# Altium PCB main.PcbDoc
Units mm, origin at the board's own origin, x right, y up, seen from the top; angles counter-clockwise.
Board outline 53.34 x 57.15 mm, 4 copper layers (Top Layer, Int1 (GND), Int2 (GND), Bottom Layer), stack 1.11 mm thick; 28 components, 19 nets, 192 pads, 0 vias.
Unrouted connection lines stored in the file: 31.
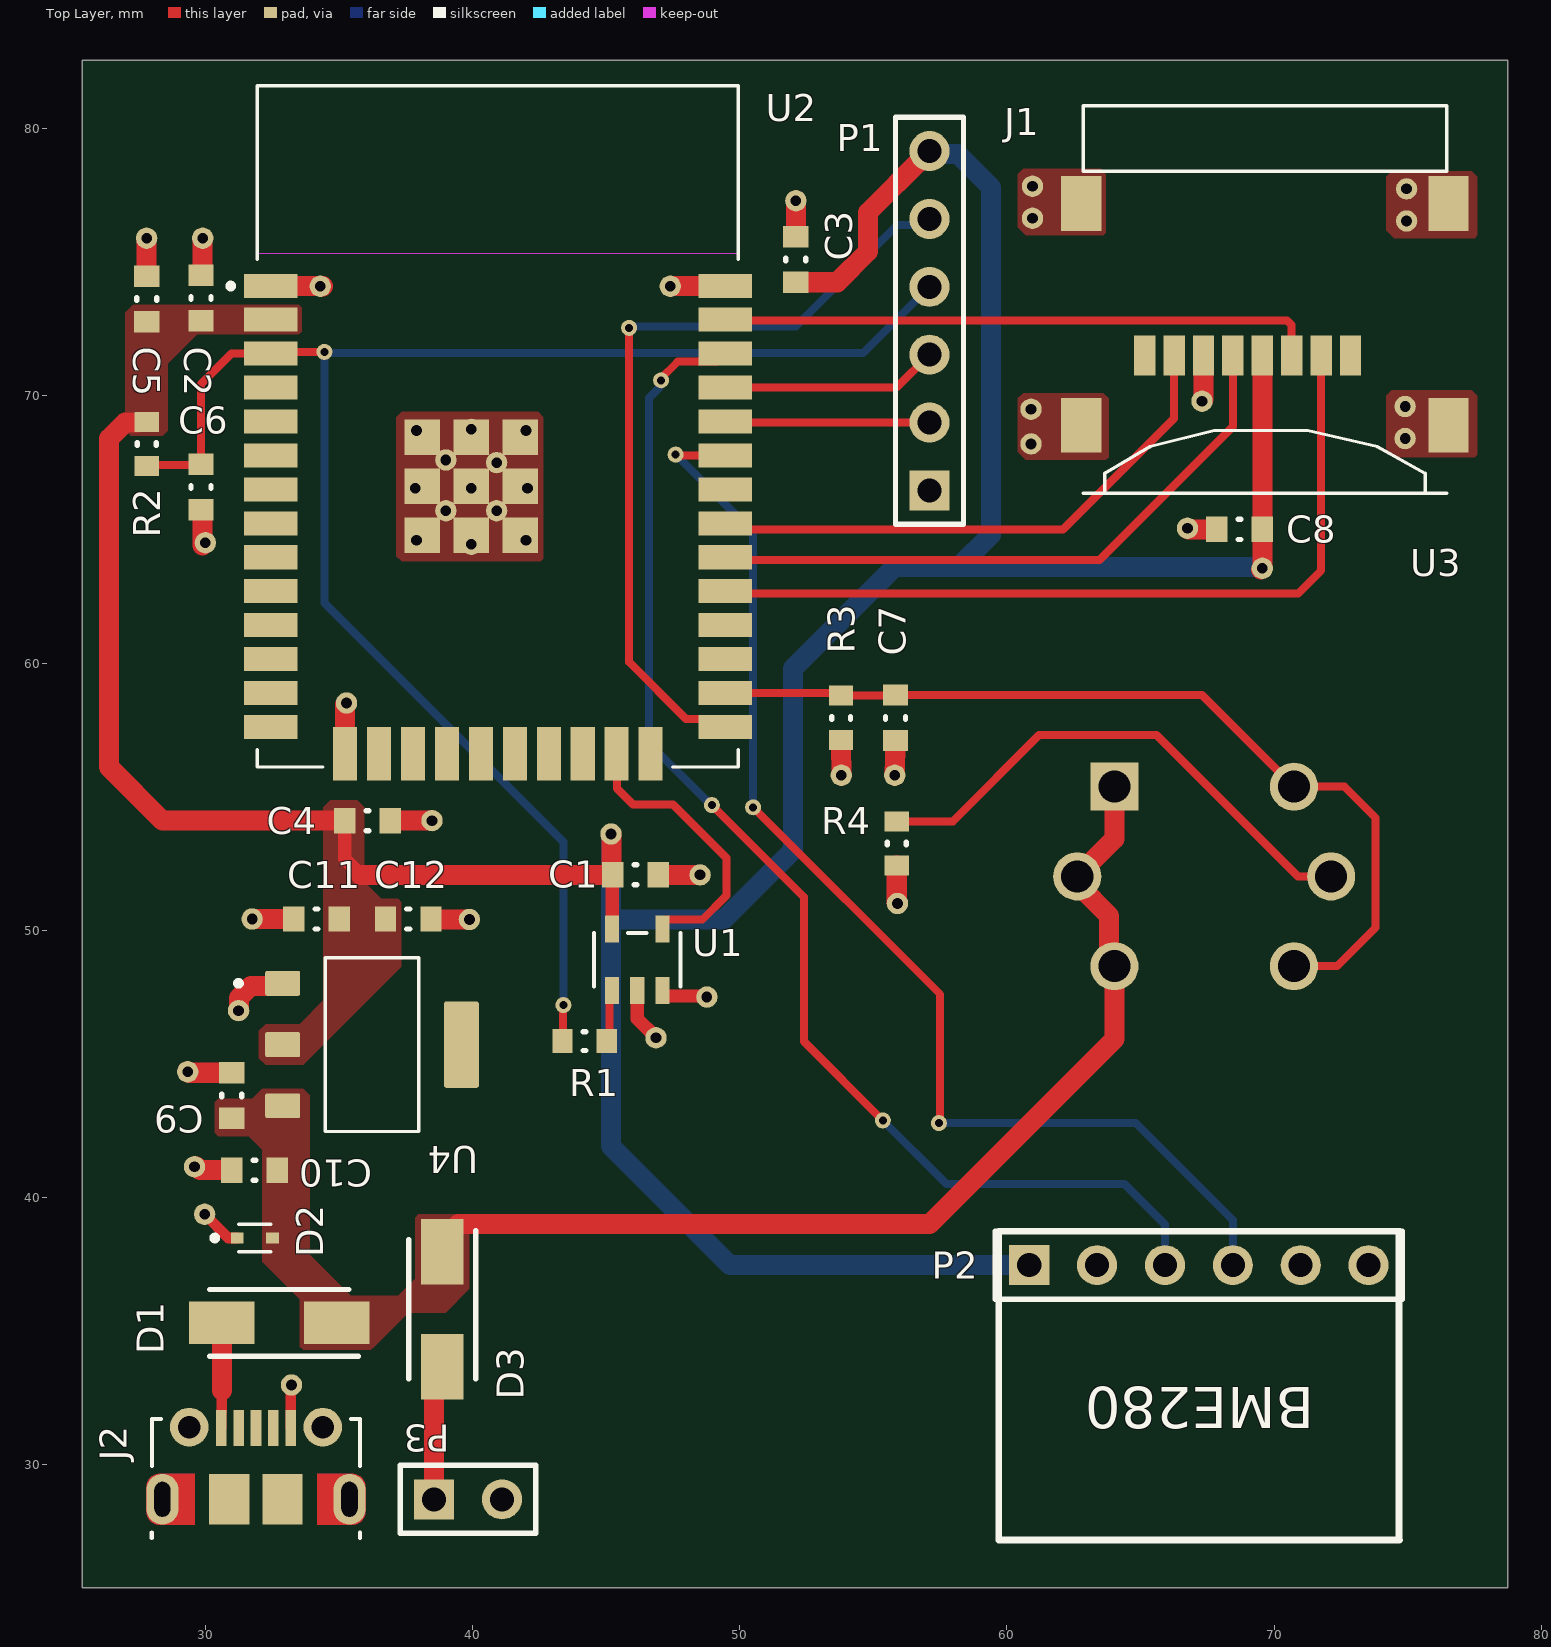
[diagram p0: Top Layer view]
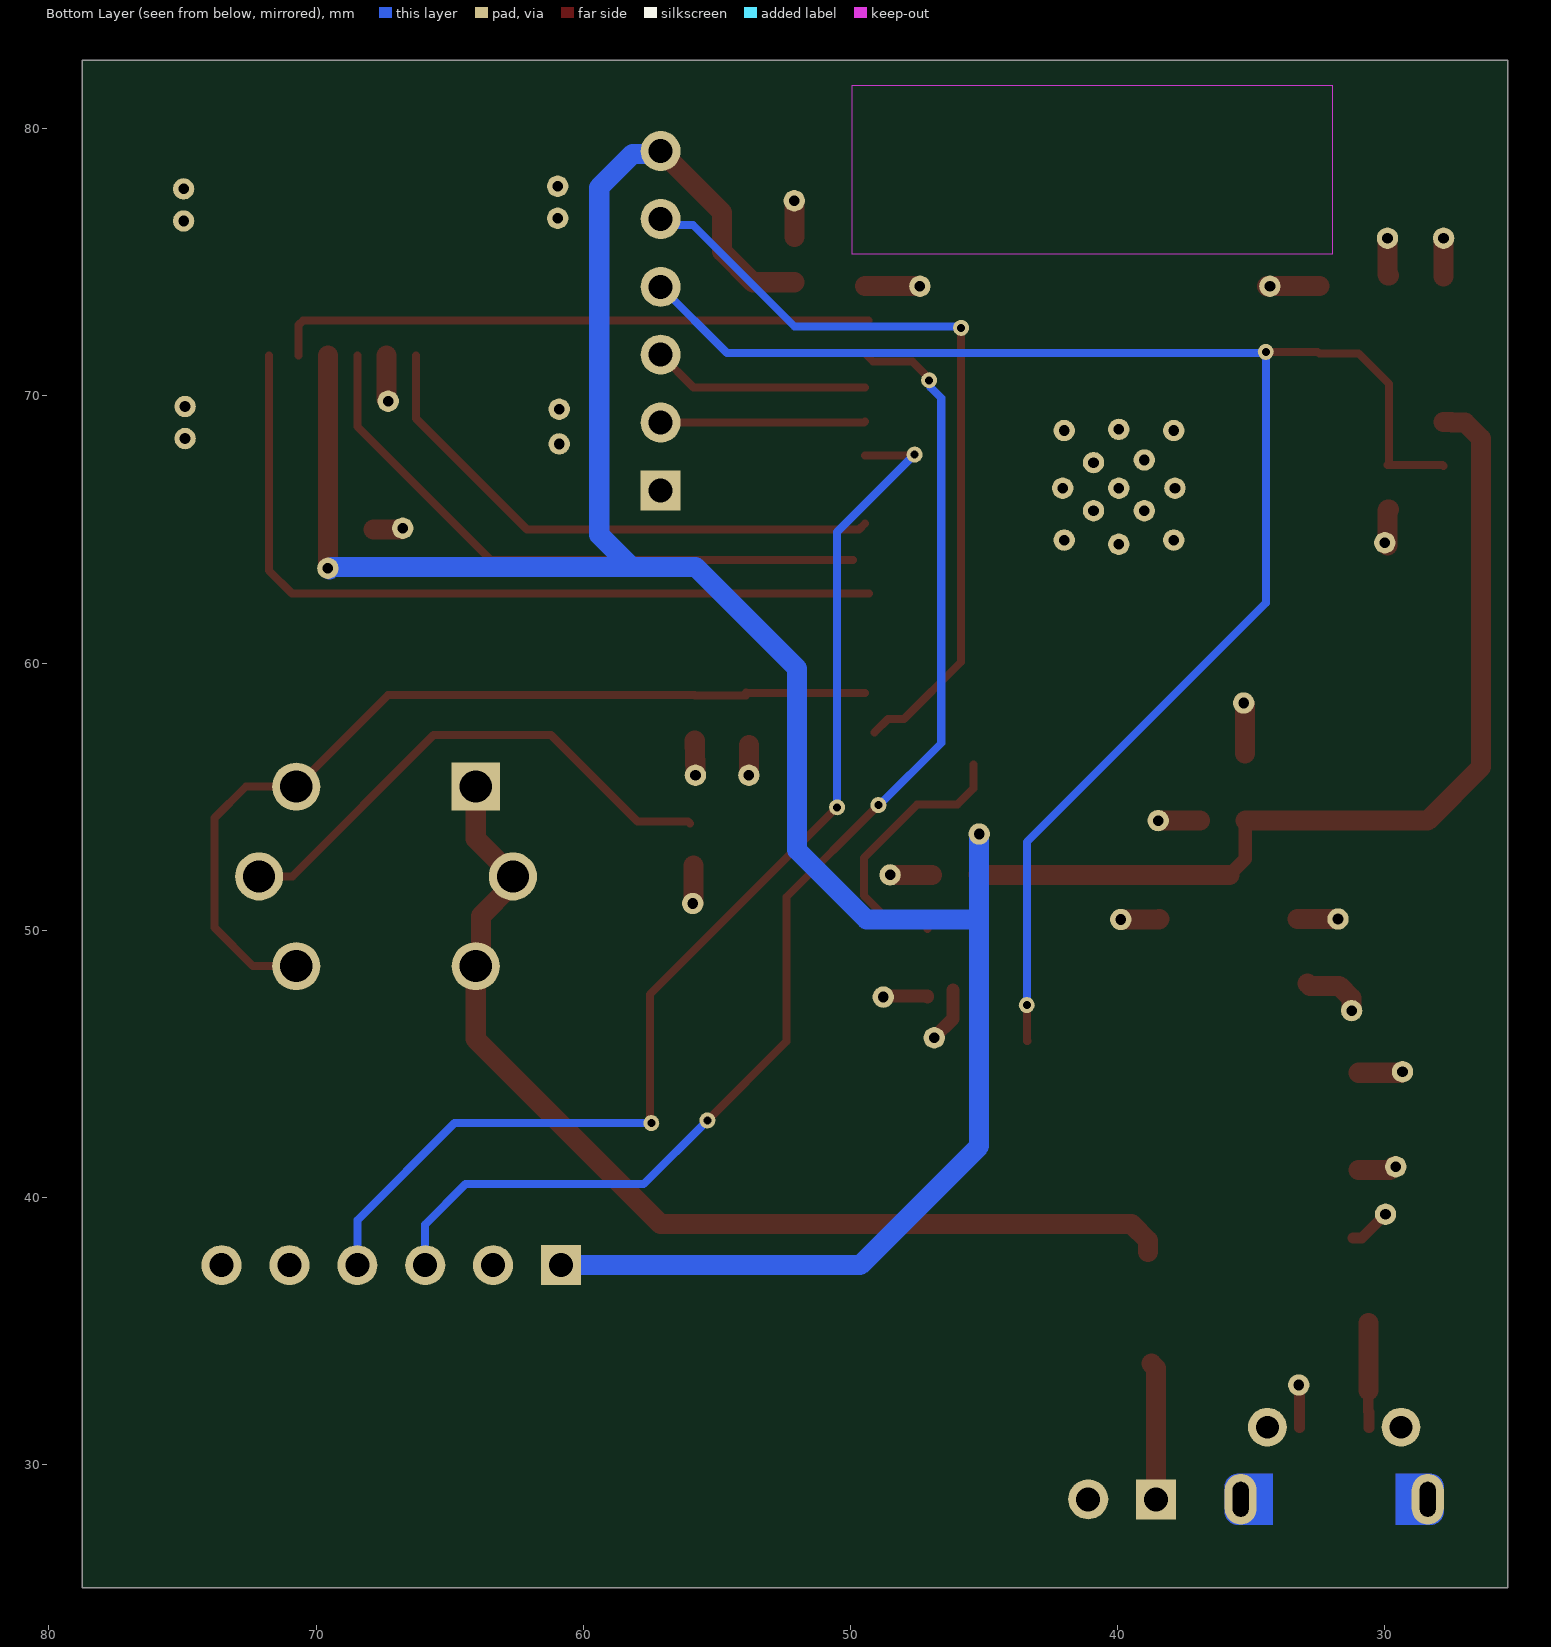
[diagram p1: Bottom Layer view, seen from below]
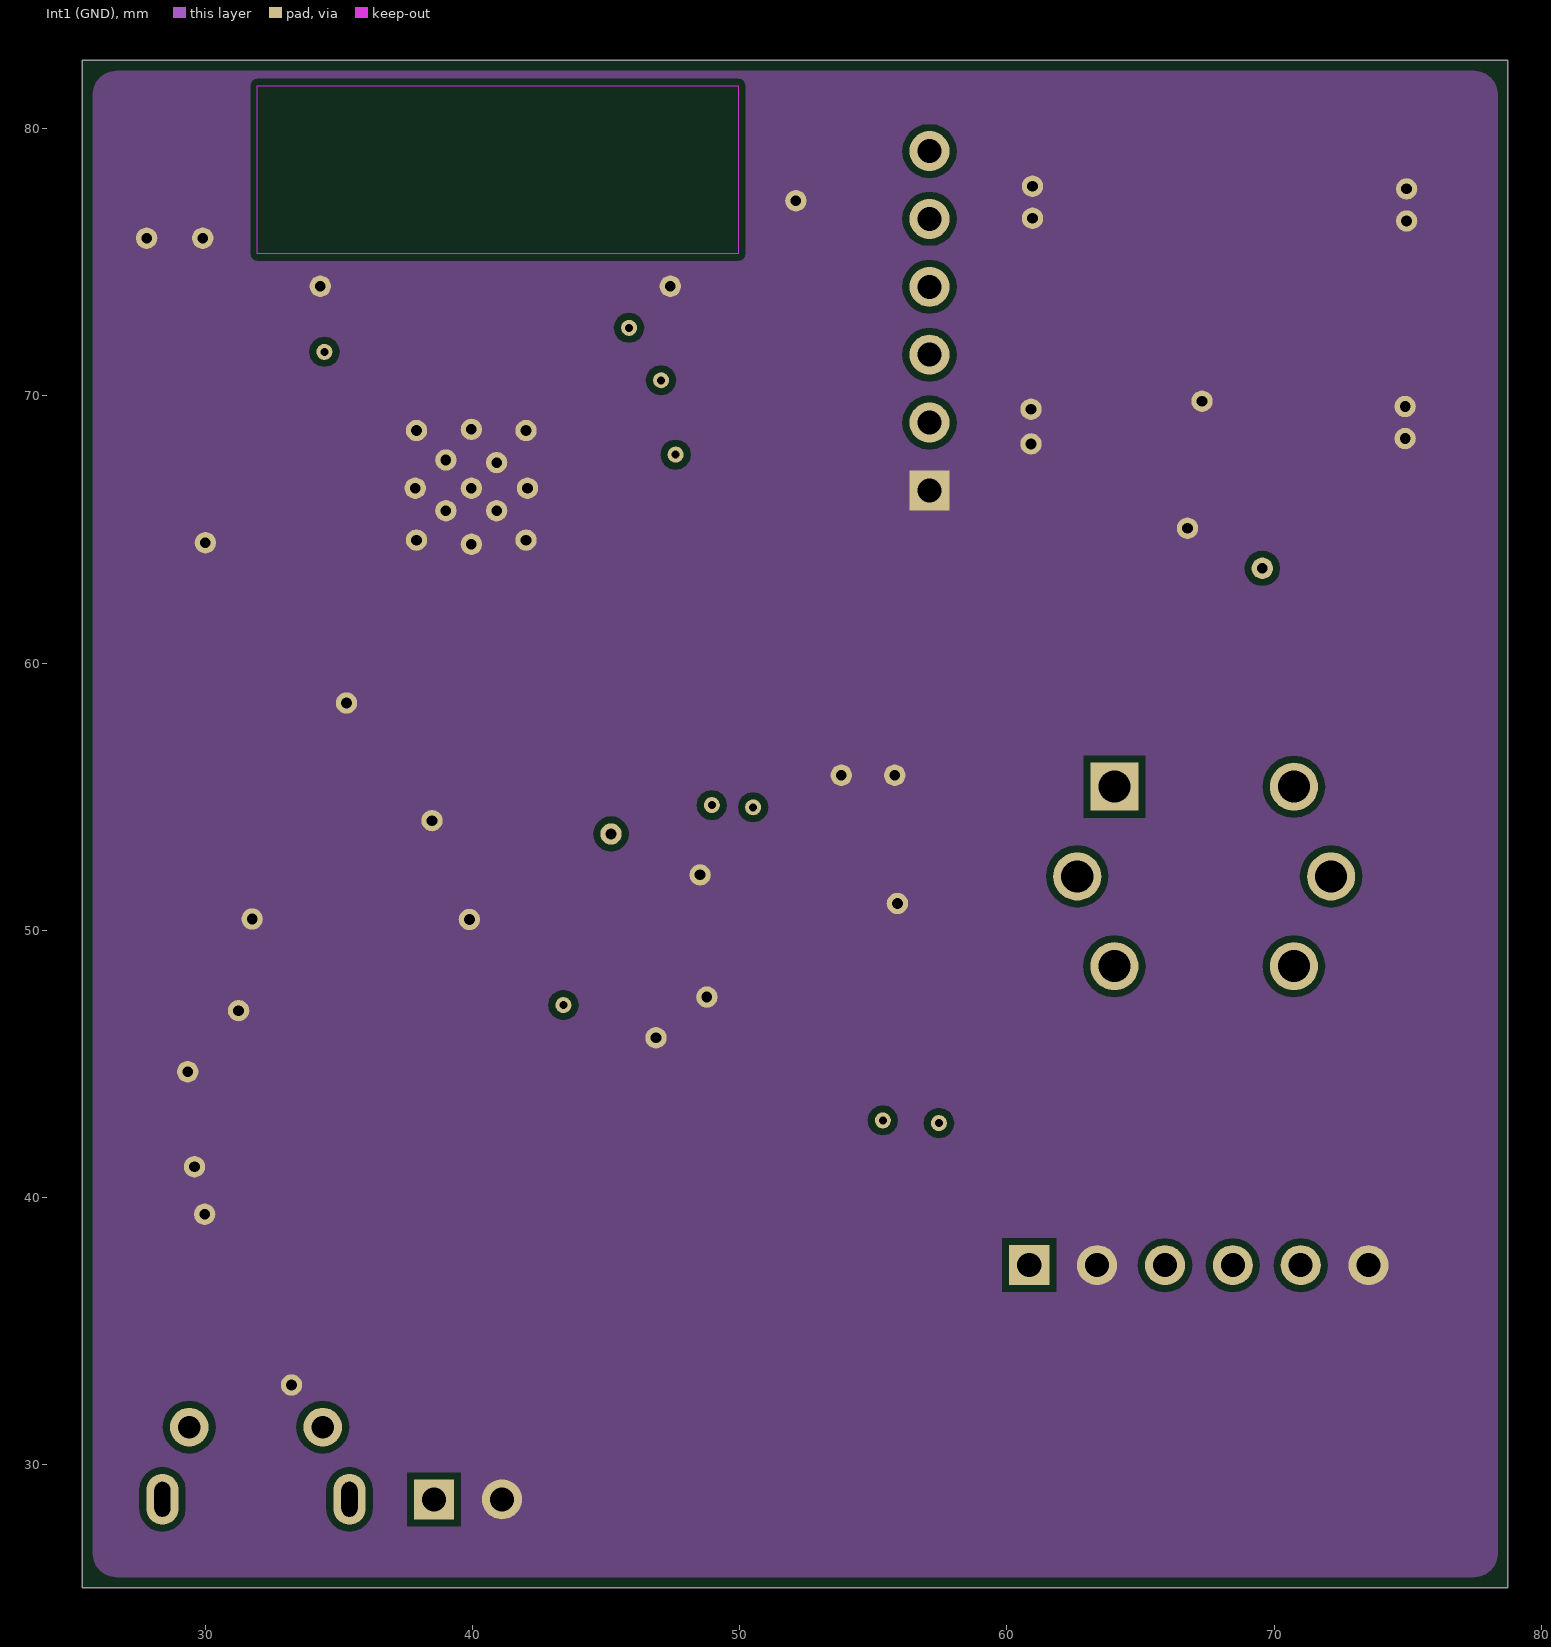
[diagram p2: Int1 (GND)]
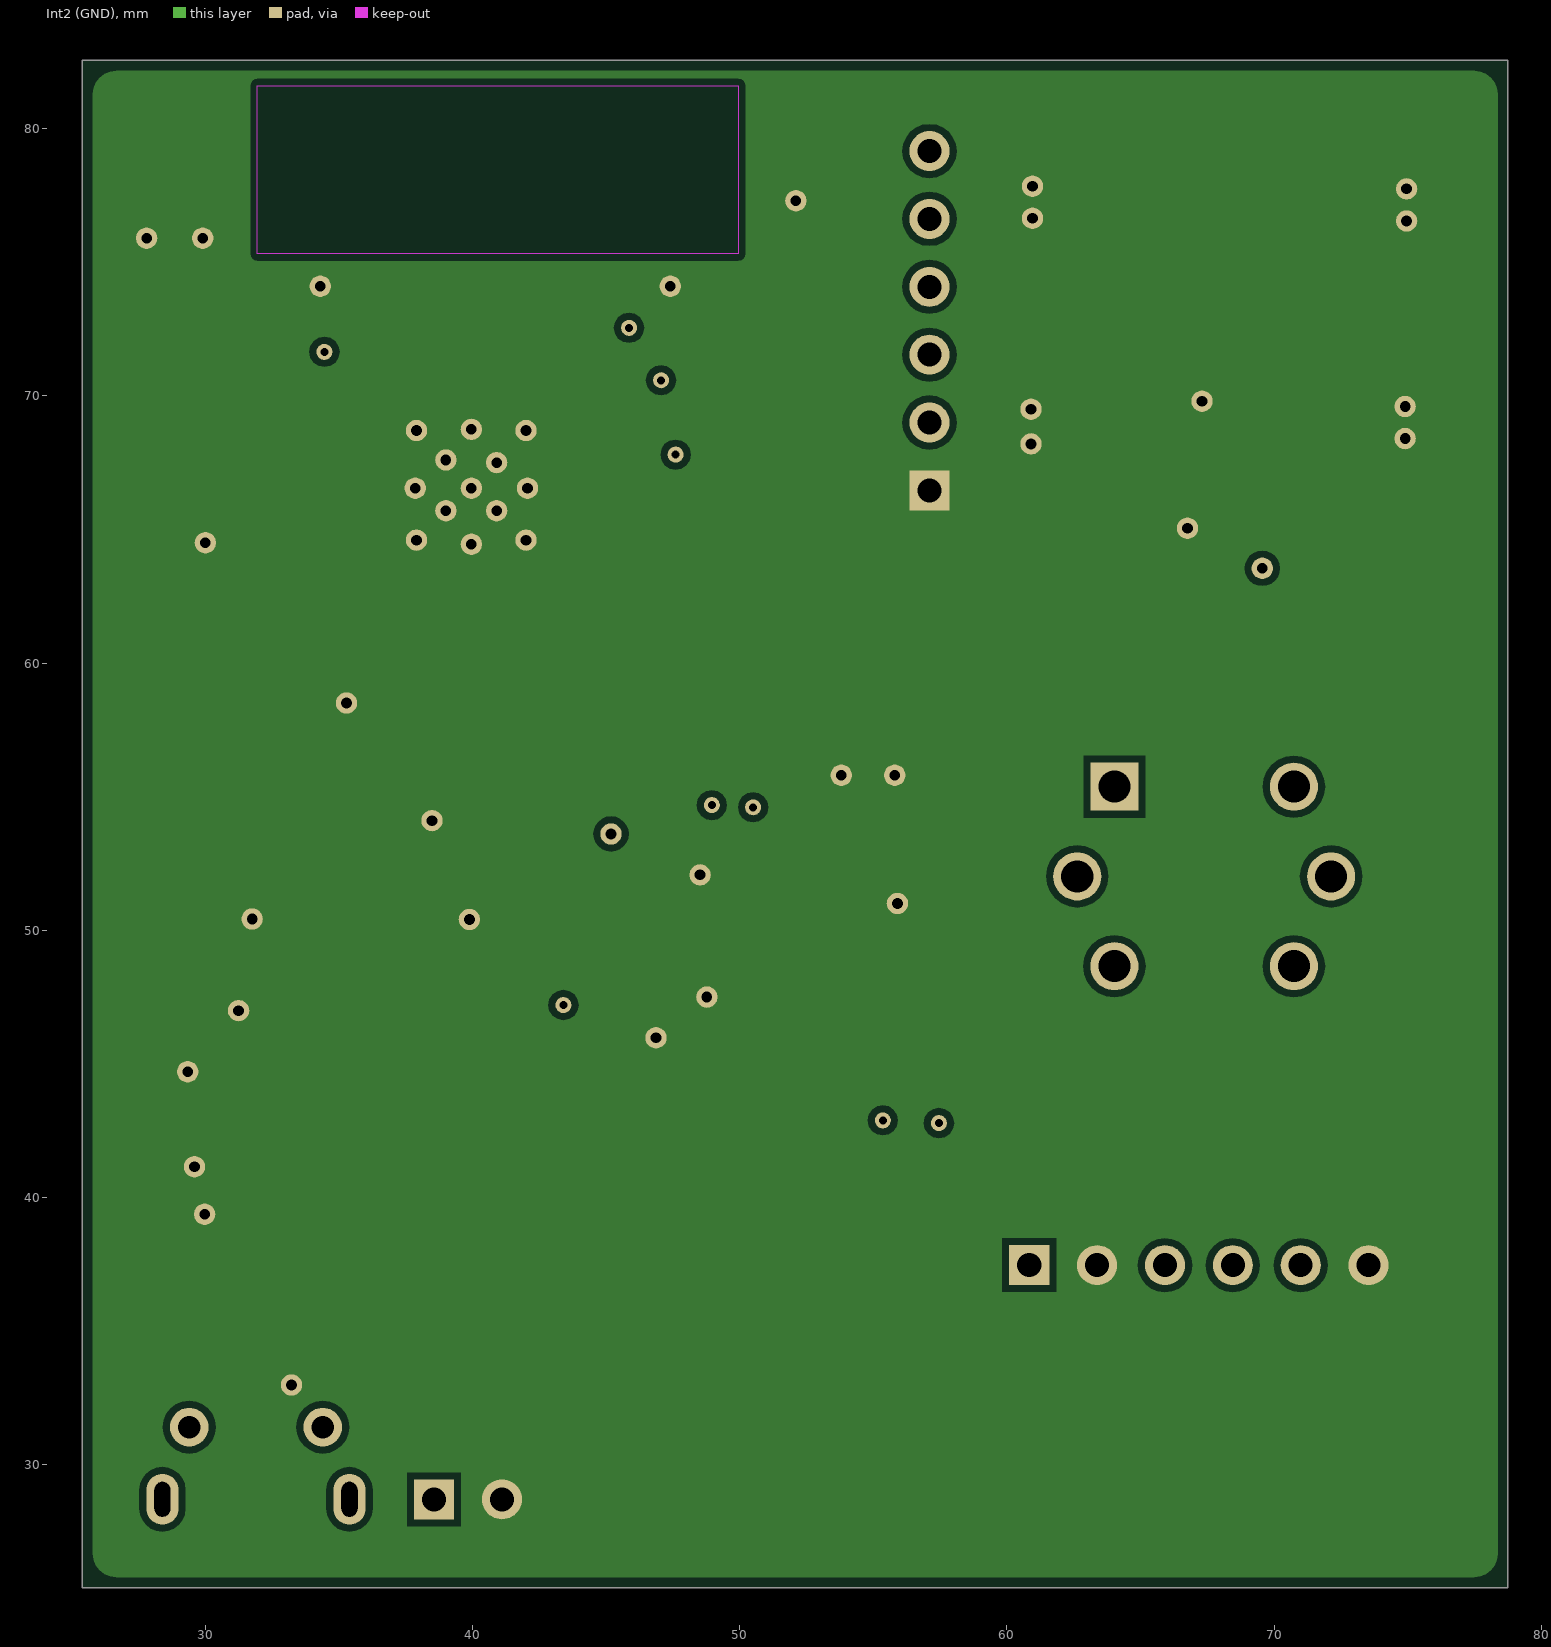
[diagram p3: Int2 (GND)]
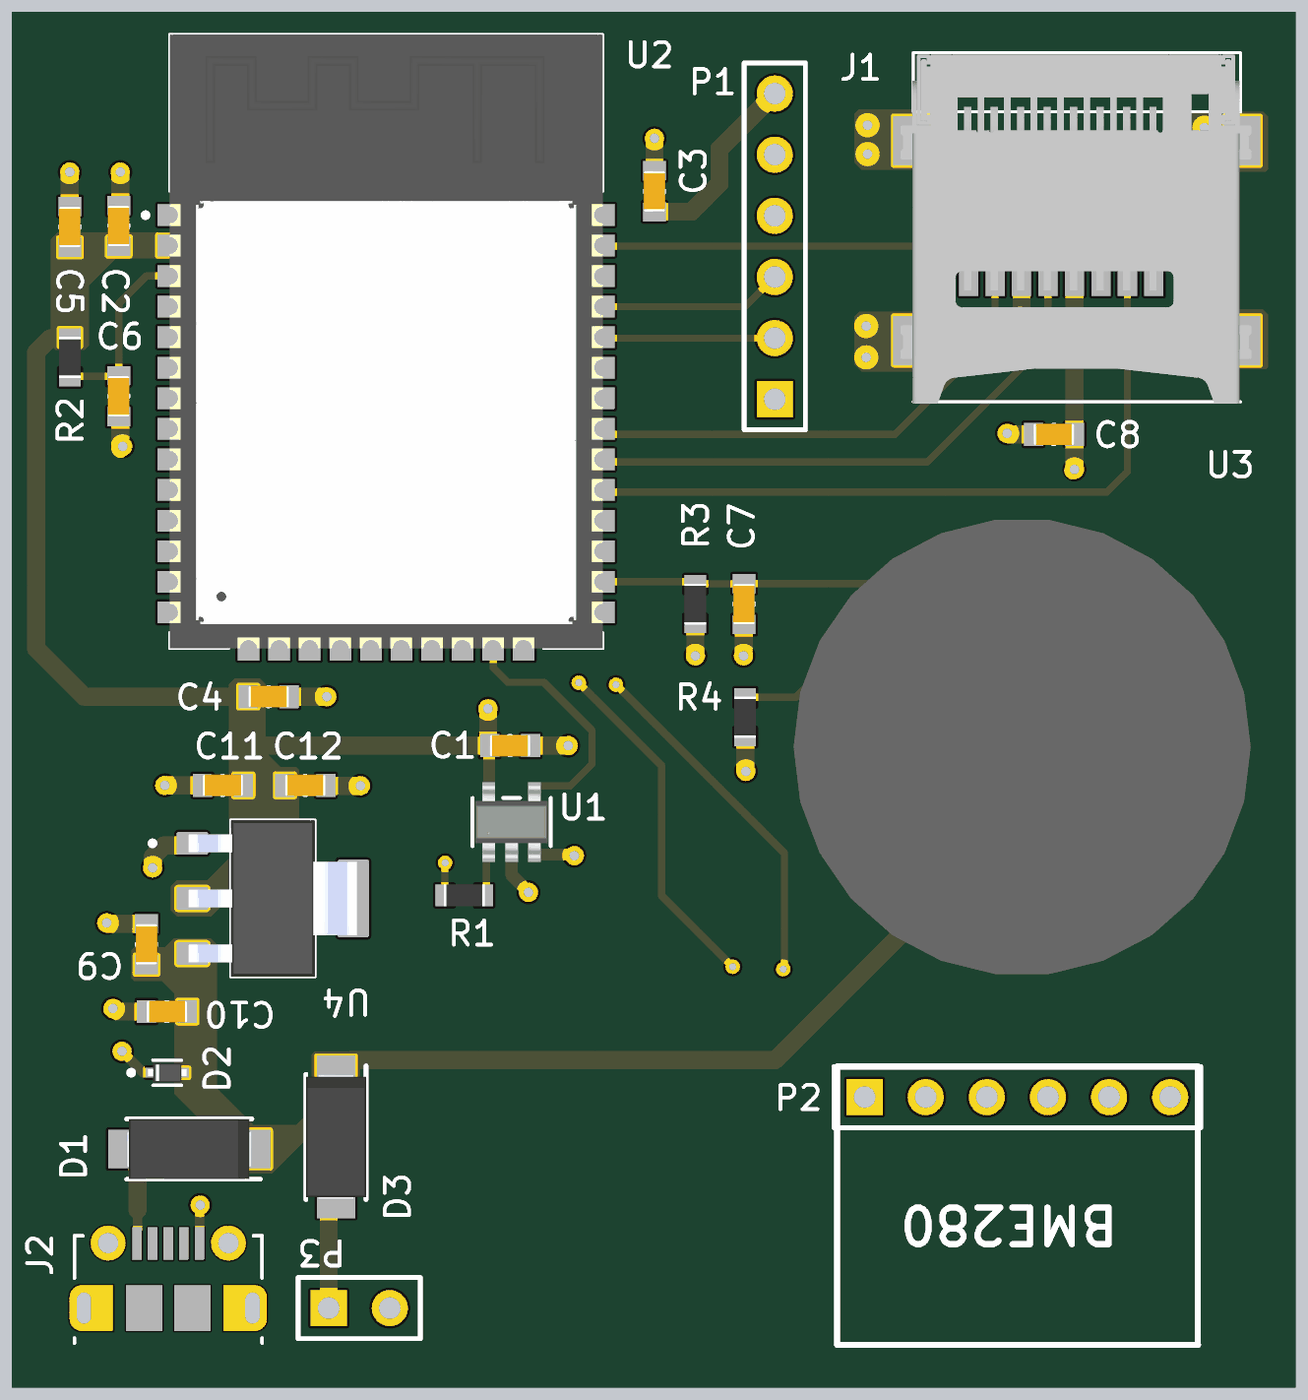
[diagram p4: 3D render of the assembled board from above, using the file's embedded part models]

## Layer stack, top to bottom
Top Solder: solder mask 0.0254, SM-001, Dk 4
Top Layer: signal copper 0.035
Dielectric 1: prepreg 0.1295, PP-017, Dk 4.3
Int1 (GND): signal copper 0.035
Dielectric 3: core 0.7112, Core-039, Dk 4.8
Int2 (GND): signal copper 0.035
Dielectric 5: prepreg 0.1295, PP-017, Dk 4.3
Bottom Layer: signal copper 0.035
Bottom Solder: solder mask 0.0254, SM-001, Dk 4

## Board outline
25.4,25.4 25.4,82.55 78.74,82.55 78.74,25.4

## Design rules (kind name [scope] priority, off if disabled: settings)
Clearance keepout [IsKeepOut] p1: gap=0.254 ignorepadtopadclearanceinfootprint=FALSE
Clearance [All] p2: gap=0.254 ignorepadtopadclearanceinfootprint=FALSE except(0: Arc-Hole Track-Hole SMDPad-Hole THPad-Hole Fill-Hole Poly-Hole Region-Hole Text-Hole; 0.127: SMDPad-SMDPad; 0.15: SMDPad-Text; 0.2: Arc-SMDPad Arc-THPad Track-SMDPad Track-THPad; 0.5: THPad-THPad Via-Hole)
PolygonConnect PowerPuddleConnect [All] p1: connectstyle=Direct reliefconductorwidth=0.254 reliefentries=4 polygonreliefangle="90 Angle" airgapwidth=0.254
PolygonConnect PowerPlaneConnect [(InNamedPolygon('InternalGndLayer1') AND InNamedPolygon('InternalGndLayer2'))] p2: connectstyle=Relief reliefconductorwidth=0.254 reliefentries=4 polygonreliefangle="90 Angle" airgapwidth=0.254
RoutingVias [All] p1: holewidth=0.3 width=0.3 viastyle="Through Hole" minholewidth=0.2 minwidth=0.25 maxholewidth=6.3 maxwidth=6.3
SolderMaskExpansion [All] p1: expansion=0.102 istentingtop=FALSE
Width [All] p1: maxlimit=1 minlimit=0.127 preferedwidth=0.3
30 further rules are at their usual default settings.

## Components (designator, comment, footprint, x,y, rotation, side; value= is the part's Value field where it differs from the comment)
C1 "100nF" CAP_0603 46.101,52.07 r0 top
C2 "100nF" CAP_0603 29.837,73.66 r270 top
C3 "100nF" CAP_0603 52.1,75.1 r270 top
C4 "100nF" CAP_0603 36.068,54.102 r180 top
C5 "10uF" CAP_0603 27.805,73.621 r270 top
C6 "100nF" CAP_0603 29.837,66.587 r90 top
C7 "100nF" CAP_0603 55.826,57.951 r90 top
C8 "100nF" CAP_0603 68.7,65 r180 top
C9 "10uF" CAP_0603 30.988,43.815 r270 top
C10 "100nF" CAP_0603 31.838,41.021 r0 top
C11 "100nF" CAP_0603 34.163,50.419 r0 top
C12 "10uF" CAP_0603 37.592,50.419 r180 top
D1 "CDBA240LL-HF" DIOM5225X250N 32.766,35.306 r180 top
D2 "LESD5D5.0CT1G" TVS_LESD5D5.0CT1G 31.192,38.481 r0 top
D3 "CDBA240LL-HF" DIOM5225X250N 38.862,35.814 r270 top
J1 "47219-2001" 47219-2001 72.855,71.501 r0 top
J2 "1050170001" MOLEX-1050170001 30.893,28.702 r0 top
P1 "Header 6" HDR1X6 57.1,66.46 r90 top
P2 "Header 6" HDR1X6 60.833,37.465 r0 top
P3 "Header 2" HDR1X2 38.56,28.7 r0 top
R1 "10k" RES_0603 44.196,45.847 r180 top
R2 "10k" RES_0603 27.805,68.199 r90 top
R3 "47k" RES_0603 53.794,57.951 r90 top
R4 "5.1R" RES_0603 55.874,53.248 r90 top
U1 "STWD100YNYWY3F" STWD100YNYWY3F 45.212,47.75 r90 top
U2 "ESP32-WROOM-32" ESP32-WROOM-32-Nx 32.448,74.118 r0 top
U3 "SEN-17049" SEN17049 64.021,55.372 r0 top
U4 "AMS1117-3.3" SOT229P700X180-4N 32.893,48.01 r0 top

## Footprints (in the part's own frame and the unit in brackets; to place one, negate y for a bottom-side part, rotate by r counter-clockwise, add the part's x,y. Pads: shape width x height; smd on the part's side, far side on the other; paste and mask are expansions set on the pad)
47219-2001 [mm] "Molex microSD"
  rect 0.8x1.5 smd: 1(0,0) 2(-1.1,0) 3(-2.2,0) 4(-3.3,0) 5(-4.4,0) 6(-5.5,0) 7(-6.6,0) 8(-7.7,0)
  rect 1.5x2.05 smd: G1(3.675,-2.6) G2(3.675,5.7) G3(-10.075,5.7) G4(-10.075,-2.6)
  silkscreen extent -10,-5.15 3.6,9.35, body extent -10.54,-5.22 4.06,9.28, height 1.87
CAP_0603 [mm] "Chip Capacitor, 2-Leads, Body 1,60x0,80mm, IPC Medium Density, 0603"
  rect 0.8x0.95 smd: 1(-0.85,0) 2(0.85,0)
  silkscreen extent -0.05,-0.38 0.05,0.38, body extent -0.85,-0.45 0.85,0.45, height 0.6
DIOM5225X250N [mm]
  rect 2.45x1.6 smd: 1(-2.15,0) 2(2.15,0)
  silkscreen extent -2.95,-1.25 2.6,1.25, body extent -2.6,-1.25 2.6,1.25, height 2.5
ESP32-WROOM-32-Nx [mm] "SMD,18x25.5mm"
  rect 2x0.9 smd: 1(0,0) 2(0,-1.27) 3(0,-2.54) 4(0,-3.81) 5(0,-5.08) 6(0,-6.35) 7(0,-7.62) 8(0,-8.89) 9(0,-10.16) 10(0,-11.43) 11(0,-12.7) 12(0,-13.97) 13(0,-15.24) 14(0,-16.51) 25(17,-16.51) 26(17,-15.24) 27(17,-13.97) 28(17,-12.7) 29(17,-11.43) 30(17,-10.16) 31(17,-8.89) 32(17,-7.62) 33(17,-6.35) 34(17,-5.08) 35(17,-3.81) 36(17,-2.54) 37(17,-1.27) 38(17,0)
  rect 0.9x2 smd: 15(2.785,-17.51) 16(4.055,-17.51) 17(5.325,-17.51) 18(6.595,-17.51) 19(7.865,-17.51) 20(9.135,-17.51) 21(10.405,-17.51) 22(11.675,-17.51) 23(12.945,-17.51) 24(14.215,-17.51)
  rect 1.33x1.33 smd: 39(5.665,-9.335) 39(5.665,-7.5) 39(5.665,-5.665) 39(7.5,-9.335) 39(7.5,-7.5) 39(7.5,-5.665) 39(9.335,-9.335) 39(9.335,-7.5) 39(9.335,-5.665)
  Keep-Out Layer region: 17.5,1.19 -0.5,1.19 -0.5,7.49 17.5,7.49
  silkscreen extent -1.6,-18.01 17.5,7.49, body extent -0.5,-18.01 17.5,7.49, height 3.25
HDR1X2 [mm] "Connector; Header; 2 Position"
  rect 1.5x1.5 hole 0.9: 1(0,0)
  round 1.5 hole 0.9: 2(2.54,0)
  silkscreen extent -1.27,-1.27 3.81,1.27
HDR1X6 [mm] "Connector; Header; 6 Position"
  rect 1.5x1.5 hole 0.9: 1(0,0)
  round 1.5 hole 0.9: 2(2.54,0) 3(5.08,0) 4(7.62,0) 5(10.16,0) 6(12.7,0)
  silkscreen extent -1.27,-1.27 13.97,1.27
MOLEX-1050170001 [mm]
  rect 0.4x1.35 smd mask+0.064: 1(-0.3,2.675) 2(0.35,2.675) 3(1,2.675) 4(1.65,2.675) 5(2.3,2.675)
  oval 1.2x1.9 hole 0.6 slot 1.3 at 90 deg mask+0: SH(-2.5,0) SH(4.5,0)
  round 1.45 hole 0.85 mask+0.064: SH(-1.5,2.7) SH(3.5,2.7)
  rect 1.5x1.9 smd mask+0.064: SH(0,0) SH(2,0)
  Top Layer region: -1.3,-0.95 -2.6,-0.95 -2.626,-0.949 -2.652,-0.947 -2.678,-0.944 -2.704,-0.939 -2.729,-0.933 -2.755,-0.926 -2.779,-0.917 -2.803,-0.907 -2.827,-0.896 -2.85,-0.883 -2.872,-0.869 -2.894,-0.855 -2.915,-0.839 -2.935,-0.822 -2.954,-0.804 -2.972,-0.785 -2.989,-0.765 -3.005,-0.744 -3.019,-0.722 -3.033,-0.7 -3.046,-0.677 -3.057,-0.653 -3.067,-0.629 -3.076,-0.605 -3.083,-0.579 -3.089,-0.554 -3.094,-0.528 -3.097,-0.502 -3.099,-0.476 -3.1,-0.45 -3.1,0.45 -3.099,0.476 -3.097,0.502 -3.094,0.528 -3.089,0.554 -3.083,0.579 -3.076,0.605 -3.067,0.629 -3.057,0.653 -3.046,0.677 -3.033,0.7 -3.019,0.722 -3.005,0.744 -2.989,0.765 -2.972,0.785 -2.954,0.804 -2.935,0.822 -2.915,0.839 -2.894,0.855 -2.872,0.869 -2.85,0.883 -2.827,0.896 -2.803,0.907 -2.779,0.917 -2.755,0.926 -2.729,0.933 -2.704,0.939 -2.678,0.944 -2.652,0.947 -2.626,0.949 -2.6,0.95 -1.3,0.95
  Top Layer region: 4.626,0.949 4.652,0.947 4.678,0.944 4.704,0.939 4.729,0.933 4.755,0.926 4.779,0.917 4.803,0.907 4.827,0.896 4.85,0.883 4.872,0.869 4.894,0.855 4.915,0.839 4.935,0.822 4.954,0.804 4.972,0.785 4.989,0.765 5.005,0.744 5.019,0.722 5.033,0.7 5.046,0.677 5.057,0.653 5.067,0.629 5.076,0.605 5.083,0.579 5.089,0.554 5.094,0.528 5.097,0.502 5.099,0.476 5.1,0.45 5.1,-0.45 5.099,-0.476 5.097,-0.502 5.094,-0.528 5.089,-0.554 5.083,-0.579 5.076,-0.605 5.067,-0.629 5.057,-0.653 5.046,-0.677 5.033,-0.7 5.019,-0.722 5.005,-0.744 4.989,-0.765 4.972,-0.785 4.954,-0.804 4.935,-0.822 4.915,-0.839 4.894,-0.855 4.872,-0.869 4.85,-0.883 4.827,-0.896 4.803,-0.907 4.779,-0.917 4.755,-0.926 4.729,-0.933 4.704,-0.939 4.678,-0.944 4.652,-0.947 4.626,-0.949 4.6,-0.95 3.3,-0.95 3.3,0.95 4.6,0.95
  Bottom Layer region: 4.626,0.949 4.652,0.947 4.678,0.944 4.704,0.939 4.729,0.933 4.755,0.926 4.779,0.917 4.803,0.907 4.827,0.896 4.85,0.883 4.872,0.869 4.894,0.855 4.915,0.839 4.935,0.822 4.954,0.804 4.972,0.785 4.989,0.765 5.005,0.744 5.019,0.722 5.033,0.7 5.046,0.677 5.057,0.653 5.067,0.629 5.076,0.605 5.083,0.579 5.089,0.554 5.094,0.528 5.097,0.502 5.099,0.476 5.1,0.45 5.1,-0.45 5.099,-0.476 5.097,-0.502 5.094,-0.528 5.089,-0.554 5.083,-0.579 5.076,-0.605 5.067,-0.629 5.057,-0.653 5.046,-0.677 5.033,-0.7 5.019,-0.722 5.005,-0.744 4.989,-0.765 4.972,-0.785 4.954,-0.804 4.935,-0.822 4.915,-0.839 4.894,-0.855 4.872,-0.869 4.85,-0.883 4.827,-0.896 4.803,-0.907 4.779,-0.917 4.755,-0.926 4.729,-0.933 4.704,-0.939 4.678,-0.944 4.652,-0.947 4.626,-0.949 4.6,-0.95 3.3,-0.95 3.3,0.95 4.6,0.95
  Bottom Layer region: -1.3,-0.95 -2.6,-0.95 -2.626,-0.949 -2.652,-0.947 -2.678,-0.944 -2.704,-0.939 -2.729,-0.933 -2.755,-0.926 -2.779,-0.917 -2.803,-0.907 -2.827,-0.896 -2.85,-0.883 -2.872,-0.869 -2.894,-0.855 -2.915,-0.839 -2.935,-0.822 -2.954,-0.804 -2.972,-0.785 -2.989,-0.765 -3.005,-0.744 -3.019,-0.722 -3.033,-0.7 -3.046,-0.677 -3.057,-0.653 -3.067,-0.629 -3.076,-0.605 -3.083,-0.579 -3.089,-0.554 -3.094,-0.528 -3.097,-0.502 -3.099,-0.476 -3.1,-0.45 -3.1,0.45 -3.099,0.476 -3.097,0.502 -3.094,0.528 -3.089,0.554 -3.083,0.579 -3.076,0.605 -3.067,0.629 -3.057,0.653 -3.046,0.677 -3.033,0.7 -3.019,0.722 -3.005,0.744 -2.989,0.765 -2.972,0.785 -2.954,0.804 -2.935,0.822 -2.915,0.839 -2.894,0.855 -2.872,0.869 -2.85,0.883 -2.827,0.896 -2.803,0.907 -2.779,0.917 -2.755,0.926 -2.729,0.933 -2.704,0.939 -2.678,0.944 -2.652,0.947 -2.626,0.949 -2.6,0.95 -1.3,0.95
  silkscreen extent -2.9,-1.45 4.9,3
RES_0603 [mm] "Chip Resistor, 2-Leads, Body 1,60x0,80mm, IPC Medium Density, 0603"
  rect 0.75x0.9 smd: 1(-0.825,0) 2(0.825,0)
  silkscreen extent -0.05,-0.35 0.05,0.35, body extent -0.85,-0.45 0.85,0.45, height 0.6
SEN17049 [mm]
  rect 1.8x1.8 hole 1.2: 1(0,0)
  round 1.8 hole 1.2: 2(-1.391,-3.359) 3(0,-6.718) 4(6.718,-6.718) 5(8.109,-3.359) 6(6.718,0)
  body extent -6.14,-12.86 12.86,6.14, height 20.1
SOT229P700X180-4N [mm] "AMS1117-3.3"
  rrect15% 1.31x0.93 smd: 1(0,0) 2(0,-2.29) 3(0,-4.58)
  rrect15% 1.31x3.24 smd: 4(6.69,-2.29)
  silkscreen extent -1.75,-5.54 5.1,0.96, body extent -0.15,-5.54 6.84,0.96, height 1.8
STWD100YNYWY3F [mm] "SOT-23-5"
  rect 1.01x0.528 smd paste+0 mask+0: 1(0,0) 2(0,-0.95) 3(0,-1.9) 4(2.288,-1.9) 5(2.288,0)
  silkscreen extent 0.14,-2.58 2.15,0.68, body extent -0.36,-2.45 2.64,0.55, height 1.45
TVS_LESD5D5.0CT1G [mm] "LESD5D5.0CT1G"
  rect 0.48x0.4 smd: 1(0,0) 2(1.32,0)
  silkscreen extent -0.94,-0.52 1.26,0.52, body extent -0.14,-0.4 1.46,0.4, height 0.7

## Part data
C1 C2 C3 C4 C5 C6 C7 C8 C9 C10 C11 C12: library part Cap_0603, "Capacitor SMD 0603 Generic"
D1 D3: "Diode", Manufacturer_Name="Comchip Technology", Mouser Part Number=750-CDBA240LL-HF, Arrow Part Number=CDBA240LL-HF, Arrow Price/Stock=https://www.arrow.com/en/products/cdba240ll-hf/comchip-technology?region=nac, Datasheet Link=https://datasheet.datasheetarchive.com/originals/distributors/Datasheets-DGA22/1401764.pdf, Height=2.5mm, Manufacturer_Part_Number=CDBA240LL-HF, Mouser Price/Stock=https://www.mouser.co.uk/ProductDetail/Comchip-Technology/CDBA240LL-HF?qs=2qJf6qQ4IOK8%252BRkX5aZc7g%3D%3D
D2: library part TVSDiode, "SOD-523 ESD Protection Devices ROHS / VRWM = 5V / VC = 11.6V / C = 15pF General Purpose speed"
J1: library part "microSD Card Conn", "1.1mm Pitch microSD Card Connector, Hinge Type, Lead Free"
J2: library part Molex_1050170001, "USB - micro B USB 2.0 Receptacle Connector 5 Position Surface Mount, Right Angle; Through Hole"
P1 P2: "Header, 6-Pin", LatestRevisionDate=17-Jul-2002, LatestRevisionNote="Re-released for DXP Platform.", Publisher="Altium Limited"
P3: "Header, 2-Pin", LatestRevisionDate=17-Jul-2002, LatestRevisionNote="Re-released for DXP Platform.", Publisher="Altium Limited"
R1 R2 R3 R4: library part Res_0603, "Resistor SMD 0603 Generic"
U1: "1.12s Active Low 1 SOT-23-5 Monitors & Reset Circuits ROHS"
U2: library part ESP32-WROOM-32-Nx, "Bluetooth, WiFi 802.11b/g/n, Bluetooth v4.2 +EDR, Class 1, 2 and 3 Transceiver Module 2.4GHz ~ 2.5GHz PCB Trace Surface Mount"
U3: "Undefined or Miscellaneous", Manufacturer_Name=SparkFun, Mouser Part Number=474-SEN-17049, Arrow Part Number=SEN-17049, Arrow Price/Stock=https://www.arrow.com/en/products/sen-17049/sparkfun-electronics?region=nac, Datasheet Link=https://eu.mouser.com/datasheet/2/813/MQ_2-1915159.pdf, Height=20mm, Manufacturer_Part_Number=SEN-17049, Mouser Price/Stock=https://www.mouser.co.uk/ProductDetail/SparkFun/SEN-17049?qs=DPoM0jnrROWDFAIFRzjoUQ%3D%3D
U4: "Sot223/Pkg 1-Amp 3.3-Volt Low Drop Out Voltage Regulatator"

## Free pads (board coordinates)
  round 0.8 hole 0.4: 2(27.8,75.9) 2(29.337,44.704) 2(29.591,41.148) 2(29.9,75.9) 2(29.972,39.37) 2(30,64.5) 2(31.242,46.99) 2(31.75,50.419) 2(33.221,32.98) 2(34.3,74.1) 2(35.281,58.502) 2(37.855,66.544) 2(37.9,64.6) 2(37.9,68.7) 2(38.481,54.102) 2(39,65.7) 2(39,67.6) 2(39.881,50.402) 2(39.955,64.444) 2(39.955,66.544) 2(39.955,68.744) 2(40.9,65.7) 2(40.9,67.5) 2(42,64.6) 2(42,68.7) 2(42.055,66.544) 2(45.181,53.602) 2(46.863,45.974) 2(47.4,74.1) 2(48.514,52.07) 2(48.768,47.498) 2(52.1,77.3) 2(53.8,55.8) 2(55.8,55.8) 2(55.9,51) 2(60.9,68.2) 2(60.9,69.5) 2(60.955,76.644) 2(60.955,77.844) 2(66.755,65.044) 2(67.3,69.8) 2(69.555,63.544) 2(74.9,68.4) 2(74.9,69.6) 2(74.955,76.544) 2(74.955,77.744)
  round 0.6 hole 0.3: 2(34.455,71.644) 2(43.4,47.2) 2(45.855,72.544) 2(47.053,70.582) 2(47.6,67.8) 2(48.953,54.682) 2(50.5,54.6) 2(55.353,42.882) 2(57.453,42.782)

## Nets (pads, with @x,y where several pads share a name; then routed paths per layer and width w, separated by ;. In a path a pad name is that pad's centre, name@x,y a point inside that pad or via, vN(x,y) a via of type N, cw(c..) or ccw(c..) an arc to the next point about the centre after c; other vN are vias at no path point)
3V3: C1.1 C2.2 C3.2 C4.2 C5.2 C8.1 C11.2 C12.2 J1.4 P1.6 P2.1 pad.2@45.181,53.602 pad.2@69.555,63.544 R2.2 U1.5 U2.2 U4.2 | length 135
  Top Layer w0.5: C4.2 35.218,52.666 35.814,52.07 ; U1.5 45.226,50.052 45.226,51.926 C1.1@45.3,52 ; C1.1@45.212,52.07 C1.1@45.231,52.051
  Top Layer w0.75: R2.2@27.8,69.024 27.51,69.024 27.486,69 27,69 26.4,68.4 26.4,56.1 28.398,54.102 C4.2 ; 35.814,52.07 C1.1@45.212,52.07 ; pad.2@45.181,53.602 45.191,53.592 45.191,52.109 C1.1@45.2,52.1 ; C3.2 53.65,74.25 54.8,75.4 54.8,76.86 56.9,78.96 P1.6@56.9,79.1 ; pad.2@69.5,63.5 69.555,63.555 J1.4
  Bottom Layer w0.75: 45.181,51.095 45.181,50.4 ; 45.181,51.219 pad.2@45.181,53.602 ; P1.6 57.206,79.054 58.146,79.054 59.4,77.8 59.4,64.8 58.2,63.6 ; P2.1@60.8,37.4 60.735,37.465 49.635,37.465 45.181,41.919 45.181,50.4 ; pad.2@69.5,63.5 69.4,63.6 58.2,63.6 ; 45.181,50.4 49.4,50.4 52,53 52,59.8 55.8,63.6 58.2,63.6
5V_VBUS: C9.2 C10.2 D1.1 D2.2 D3.1 U3.1 U3.2 U3.3 U4.3 | length 39.2
  Top Layer w0.75: D3.1 38.862,38.389 39.473,39 57.1,39 64.021,45.921 U3.3@64.021,48.579 ; U3.2@62.6,52 64.021,53.421 U3.1 ; U3.2@62.7,52 62.7,51.659 63.82,50.539 63.82,48.855 U3.3
A_OUT: C7.2 R3.2 U2.26 U3.4 U3.6 | length 34
  Top Layer w0.3: U2.26 53.878,58.878 R3.2@53.9,58.9 ; R3.2@53.9,58.788 55.814,58.788 C7.2 67.299,58.801 U3.6@70.7,55.4 ; U3.4 72.354,48.654 73.8,50.1 73.8,54.2 72.628,55.372 U3.6
cathbattery: D3.2 P3.1 | length 5.2
  Top Layer w0.75: P3.1 38.56,33.607 D3.2@38.735,33.782
cathusb: D1.2 J2.1 | length 3.9
  Top Layer w0.4: J2.1 30.593,31.969 30.616,31.992 30.616,32.775
  Top Layer w0.75: 30.616,32.775 D1.2
CS: J1.2 U2.29 | length 30.9
  Top Layer w0.3: U2.29@49.3,62.6 70.9,62.6 71.755,63.455 J1.2
EN: C6.2 P1.4 pad.2@34.455,71.644 pad.2@43.4,47.2 R1.2 R2.1 U2.3 | length 63.4
  Top Layer w0.3: R2.1 27.836,67.405 C6.2@29.894,67.405 ; C6.2 29.837,70.437 30.978,71.578 U2.3 32.514,71.644 32.7,71.644 34.356,71.644 pad.2@34.4,71.6 ; R1.2 43.386,45.862 43.386,47.186 pad.2@43.4,47.2
  Bottom Layer w0.3: pad.2@43.4,47.2 43.4,53.3 34.455,62.245 34.455,71.545 34.4,71.6 54.62,71.6 P1.4
GND: C1.2 C2.1 C3.1 C4.1 C5.1 C6.1 C7.1 C8.2 C9.1 C10.1 C11.1 C12.1 D2.1 J1.6 J1.G1 J1.G2 J1.G3 J1.G4 J2.5 P1.1 P2.2 P2.6 P3.2 pad.2@27.8,75.9 pad.2@29.9,75.9 pad.2@29.337,44.704 pad.2@29.591,41.148 pad.2@29.972,39.37 pad.2@30,64.5 pad.2@31.75,50.419 pad.2@31.242,46.99 pad.2@33.221,32.98 pad.2@34.3,74.1 pad.2@35.281,58.502 pad.2@37.9,64.6 pad.2@37.9,68.7 pad.2@37.855,66.544 pad.2@38.481,54.102 pad.2@39,65.7 pad.2@39,67.6 pad.2@39.881,50.402 pad.2@39.955,64.444 pad.2@39.955,66.544 pad.2@39.955,68.744 pad.2@40.9,65.7 pad.2@40.9,67.5 pad.2@42,64.6 pad.2@42,68.7 pad.2@42.055,66.544 pad.2@46.863,45.974 pad.2@47.4,74.1 pad.2@48.514,52.07 pad.2@48.768,47.498 pad.2@52.1,77.3 pad.2@53.8,55.8 pad.2@55.8,55.8 pad.2@55.9,51 pad.2@60.9,68.2 pad.2@60.9,69.5 pad.2@60.955,76.644 pad.2@60.955,77.844 pad.2@66.755,65.044 pad.2@67.3,69.8 pad.2@74.9,68.4 pad.2@74.9,69.6 pad.2@74.955,76.544 pad.2@74.955,77.744 R3.1 R4.1 U1.2 U1.3 U2.1 U2.15 U2.38 U2.39 U4.1 | length 36.8
  Top Layer w0.4: pad.2@29.972,39.37 30.861,38.481 D2.1 ; pad.2@33.147,33.02 33.193,32.974 J2.5
  Top Layer w0.5: U1.2 46.162,46.689 46.863,45.988 pad.2@46.863,45.974 ; U1.3@47.117,47.498 47.117,47.53 47.126,47.539 48.682,47.539 pad.2@48.768,47.625
  Top Layer w0.75: pad.2@27.8,75.9 27.8,74.476 C5.1 ; pad.2@29.337,44.704 29.351,44.704 29.39,44.665 C9.1 ; pad.2@29.591,41.148 29.672,41.148 29.799,41.021 C10.1 ; C6.1 29.875,65.737 29.9,65.712 pad.2@29.9,64.4 ; C2.1 29.875,74.51 29.9,74.535 pad.2@29.9,75.9 ; pad.2@31.242,46.99 31.252,47 31.252,47.465 31.706,47.92 32.803,47.92 U4.1 ; pad.2@31.75,50.419 C11.1@33.274,50.419 ; U2.1 34.382,74.118 pad.2@34.4,74.1 ; U2.15 35.233,58.44 35.293,58.5 pad.2@35.3,58.5 ; C4.1 pad.2@38.481,54.102 ; C12.1 38.459,50.402 pad.2@39.881,50.402 ; C1.2 pad.2@48.514,52.07 ; pad.2@47.4,74.1 47.418,74.118 U2.38 ; C3.1 pad.2@52.1,77.3 ; R3.1@53.794,56.926 pad.2@53.8,55.8 ; pad.2@55.8,55.8 C7.1 ; R4.1 55.874,51.04 55.9,51.014 pad.2@55.9,51 ; pad.2@66.8,65 C8.2 ; pad.2@67.3,69.8 67.3,69.814 67.355,69.869 J1.6
IO0: P1.5 pad.2@45.855,72.544 U2.25 | length 29.8
  Top Layer w0.3: pad.2@45.855,72.544 45.855,60.045 47.992,57.908 48.598,57.908 49.1,57.406 U2.25@49.1,57.4
  Bottom Layer w0.3: pad.2@45.8,72.6 52.1,72.6 55.9,76.4 56.88,76.4 P1.5
MISO: J1.7 U2.31 | length 21
  Top Layer w0.3: U2.31 49.676,65 62.1,65 66.255,69.155 J1.7
MOSI: J1.3 U2.37 | length 22.6
  Top Layer w0.3: U2.37@49.322,72.822 70.479,72.822 70.655,72.647 J1.3
mq2-5: R4.2 U3.5 | length 19.7
  Top Layer w0.3: R4.2@56,54 56.073,54.073 57.973,54.073 61.2,57.3 65.6,57.3 70.887,52.013 U3.5
NetR1_1: R1.1 U1.1 | length 2
  Top Layer w0.3: R1.1 45.117,45.943 45.117,47.717 U1.1@45.2,47.8
RX: P1.2 U2.34 | length 7.8
  Top Layer w0.3: U2.34 49.486,69 P1.2 P1.2@57.2,69.1
SCL: P2.3 pad.2@47.053,70.582 pad.2@48.953,54.682 pad.2@55.353,42.882 U2.36 | length 48
  Top Layer w0.3: pad.2@47,70.6 47.678,71.278 49.148,71.278 U2.36 ; pad.2@48.953,54.682 52.4,51.235 52.4,45.835 pad.2@55.353,42.882
  Bottom Layer w0.3: pad.2@47.053,70.582 46.995,70.525 46.995,70.313 46.6,69.917 46.6,57 pad.2@48.918,54.682 ; pad.2@55.353,42.882 57.735,40.5 64.4,40.5 65.913,38.987 P2.3
SCLK: J1.5 U2.30 | length 23.3
  Top Layer w0.3: U2.30@49.9,63.86 63.46,63.86 68.455,68.855 J1.5
SDA: P2.4 pad.2@47.6,67.8 pad.2@50.5,54.6 pad.2@57.453,42.782 U2.33 | length 45.3
  Top Layer w0.3: pad.2@47.468,67.768 U2.33 ; pad.2@50.5,54.6 57.5,47.6 pad.2@57.5,42.8
  Bottom Layer w0.3: pad.2@47.6,67.8 50.5,64.9 pad.2@50.5,54.6 ; pad.2@57.453,42.782 64.818,42.782 68.453,39.147 P2.4
TX: P1.3 U2.35 | length 8.2
  Top Layer w0.3: U2.35 55.868,70.308 P1.3 P1.3@57.1,71.6
WDI: U1.4 U2.23 | length 10.5
  Top Layer w0.3: U2.23@45.4,56.2 45.4,55.3 46,54.7 47.5,54.7 49.5,52.7 49.5,51.3 48.593,50.393 47.226,50.393 47.226,50.3 47.112,50.186 U1.4
pads on no net: J1.1 J1.8 J2.2 J2.3 J2.4 J2.SH P2.5 U2.4 U2.5 U2.6 U2.7 U2.8 U2.9 U2.10 U2.11 U2.12 U2.13 U2.14 U2.16 U2.17 U2.18 U2.19 U2.20 U2.21 U2.22 U2.24 U2.27 U2.28 U2.32 U4.4

## Polygon pours and split planes (outlines as drawn)
GND on Top Layer "GND_L01_P018" (solid, pour order 18): 37.15,69.2 37.35,69.4 42.45,69.4 42.65,69.2 42.65,63.9 42.55,63.8 37.35,63.8 37.15,64
GND on Top Layer "GND_L01_P017" (solid, pour order 17): 74.4,78.4 74.2,78.2 74.2,76.2 74.5,75.9 77.5,75.9 77.6,76 77.6,78.2 77.4,78.4
GND on Top Layer "GND_L01_P016" (solid, pour order 16): 74.4,70.2 74.2,70 74.2,68 74.5,67.7 77.5,67.7 77.6,67.8 77.6,70 77.4,70.2
GND on Top Layer "GND_L01_P015" (solid, pour order 15): 60.6,70.1 60.4,69.9 60.4,67.9 60.7,67.6 63.7,67.6 63.8,67.7 63.8,69.9 63.6,70.1
GND on Top Layer "GND_L01_P013" (solid, pour order 13): 60.6,78.5 60.4,78.3 60.4,76.3 60.7,76 63.6,76 63.7,76.1 63.7,78.3 63.5,78.5
3V3 on Top Layer "3V3_L01_P012" (solid, remove dead copper, pour order 12): 27,68.7 27,73.1 27.3,73.4 33.5,73.4 33.6,73.3 33.6,72.4 33.5,72.3 29.7,72.3 28.6,71.2 28.6,68.7 28.4,68.5 27.2,68.5
3V3 on Top Layer "3V3_L01_P010" (solid, remove dead copper, pour order 10): 33.528,46.482 34.417,47.371 34.417,54.61 34.671,54.864 35.687,54.864 35.941,54.61 35.941,51.816 36.576,51.181 37.211,51.181 37.338,51.054 37.338,48.641 33.655,44.958 32.258,44.958 32.004,45.212 32.004,46.228 32.258,46.482
5V_VBUS on Top Layer "5V_VBUS_L01_P009" (solid, pour order 9): 33.528,36.195 32.131,37.592 32.131,41.783 31.623,42.291 30.48,42.291 30.353,42.418 30.353,43.561 30.48,43.688 31.75,43.688 32.131,44.069 33.655,44.069 33.909,43.815 33.909,37.846 35.433,36.322 37.211,36.322 37.846,36.957 37.846,39.243 37.973,39.37 39.751,39.37 39.878,39.243 39.878,36.576 38.989,35.687 37.592,35.687 36.322,34.417 36.195,34.29 33.655,34.29 33.528,34.417
GND on Int2 (GND) "GND_Int2" (solid, pour order 5): 25.4,25.4 25.4,82.55 78.74,82.55 78.74,25.4
GND on Int1 (GND) "GND_Int1" (solid, pour order 2): 25.4,25.4 25.4,82.55 78.74,82.55 78.74,25.4

## Silkscreen, mask and mechanical layers (free items; w line width, h text height)
Top Overlay:
  lines w0.254: 59.69,38.678 59.69,27.178 74.69,27.178 ; 59.69,38.735 74.69,38.735 ; 74.676,27.178 74.676,38.678
  text "BME280" at 71.501,32.893 h1.52 r180

## Text inside footprints (layer, text, board x,y; h text height)
U2: Mechanical 13 "ANTENNA" at 34.948,77.858 h1.02